# EAGLE board vuMeter (EAGLE 9.1.3)
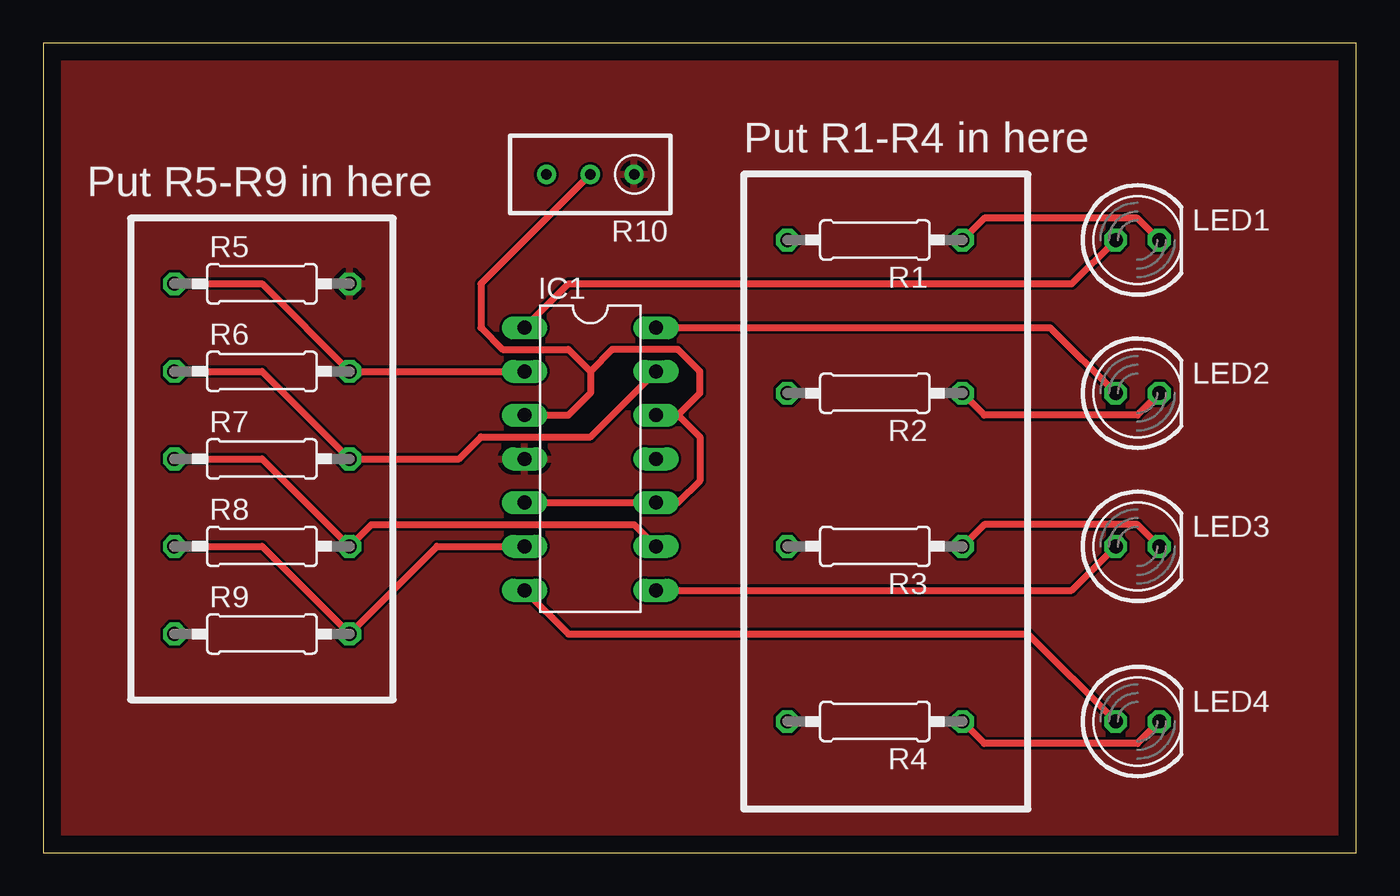
[diagram p0: board, top side]
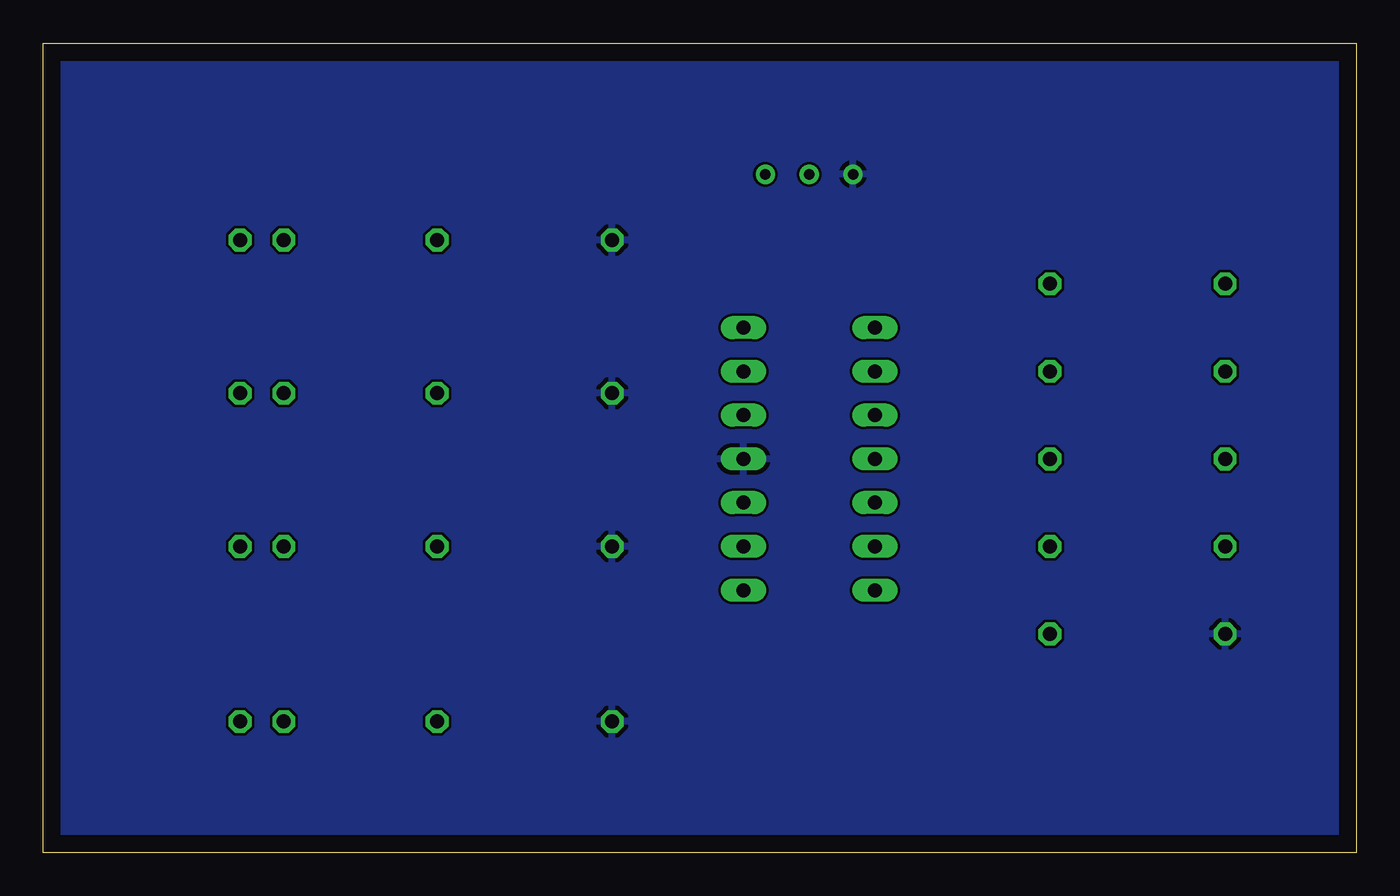
[diagram p1: board, bottom side, seen from below]

Size 76.2 x 46.99 mm. Coordinates in mm from the lower left corner, seen from the top.
Outline: 0,0 76.2,0 76.2,46.99 0,46.99 0,0
Copper layers (1*16): Top 0.035mm / dielectric 1.5mm / Bottom 0.035mm
Design rules "default": minimum track width 6mil, minimum drill 0.35mm, track to track 6mil, track to pad 6mil, pad to pad 6mil, via to via 6mil, smd to smd 6mil, copper to edge 40mil, drill to drill 6mil, minimum pad ring 10mil, minimum via ring 8mil, stop-mask expansion 4mil, vias tented up to drill 0mil, thermal gap 10mil

## Footprints (pad centres in the part's own frame; a part is rotated, then mirrored left to right if it is on the bottom)
DIL14 = drill 0.813 long: 1 -7.62,-3.81; 2 -5.08,-3.81; 3 -2.54,-3.81; 4 0,-3.81; 5 2.54,-3.81; 6 5.08,-3.81; 7 7.62,-3.81; 8 7.62,3.81; 9 5.08,3.81; 10 2.54,3.81; 11 0,3.81; 12 -2.54,3.81; 13 -5.08,3.81; 14 -7.62,3.81
LED5MM = drill 0.813 octagon: A -1.27,0; K 1.27,0
0207/10 = drill 0.813 octagon: 1 -5.08,0; 2 5.08,0
RTRIM3296W = drill 0.61: 1 0,-2.54; 2 0,0; 3 0,2.54

## Placement (x,y rotation side)
IC1  LM324N  [DIL14]  31.75,22.86 270 top
LED1  [LED5MM]  63.5,35.56 0 top
LED2  [LED5MM]  63.5,26.67 0 top
LED3  [LED5MM]  63.5,17.78 0 top
LED4  [LED5MM]  63.5,7.62 0 top
R1  2.2k  [0207/10]  48.26,35.56 180 top
R2  2.2k  [0207/10]  48.26,26.67 180 top
R3  2.2k  [0207/10]  48.26,17.78 180 top
R4  2.2k  [0207/10]  48.26,7.62 180 top
R5  10k  [0207/10]  12.7,33.02 0 top
R6  10k  [0207/10]  12.7,27.94 0 top
R7  10k  [0207/10]  12.7,22.86 0 top
R8  10k  [0207/10]  12.7,17.78 0 top
R9  10k  [0207/10]  12.7,12.7 0 top
R10  [RTRIM3296W]  31.75,39.37 90 top

## Library data of the parts
IC1 = linear
LED1-LED4 = led
R1-R9 = rcl; SPICEPREFIX: R
R10 = resistor

## Nets
GND: IC1.11 R1.2 R2.2 R3.2 R4.2 R9.1 R10.3
N$1: IC1.2 R5.1 R6.2
N$2: IC1.13 R6.1 R7.2
N$3: IC1.9 R7.1 R8.2
N$4: IC1.6 R8.1 R9.2
N$5: IC1.1 LED1.A
N$6: LED1.K R1.1
N$7: IC1.14 LED2.A
N$8: LED2.K R2.1
N$9: IC1.8 LED3.A
N$10: IC1.7 LED4.A
N$11: LED4.K R4.1
N$12: LED3.K R3.1
VCC: IC1.4 R5.2 R10.1
VIN: IC1.3 IC1.5 IC1.10 IC1.12 R10.2

## Tracks (layer width: path | path; a pad name or v marks a point on that pad's centre or on a via)
GND
  pour Bottom: 0,0 76.2,0 76.2,46.99 0,46.99
N$1
  Top 0.406: R5.1 12.7,33.02 R6.2 IC1.2
N$2
  Top 0.406: R6.1 12.7,27.94 R7.2 24.13,22.86 25.4,24.13 31.75,24.13 IC1.13
N$3
  Top 0.406: R7.1 12.7,22.86 R8.2 19.05,19.05 34.29,19.05 IC1.9
N$4
  Top 0.406: R8.1 12.7,17.78 R9.2 22.86,17.78 IC1.6
N$5
  Top 0.406: IC1.1 30.48,33.02 59.69,33.02 LED1.A
N$6
  Top 0.406: LED1.K 63.5,36.83 54.61,36.83 R1.1
N$7
  Top 0.406: IC1.14 58.42,30.48 LED2.A
N$8
  Top 0.406: LED2.K 63.5,25.4 54.61,25.4 R2.1
N$9
  Top 0.406: IC1.8 59.69,15.24 LED3.A
N$10
  Top 0.406: IC1.7 30.48,12.7 57.15,12.7 LED4.A
N$11
  Top 0.406: LED4.K 63.5,6.35 54.61,6.35 R4.1
N$12
  Top 0.406: LED3.K 63.5,19.05 54.61,19.05 R3.1
VCC
  pour Top: 0,0 76.2,0 76.2,46.99 0,46.99
VIN
  Top 0.406: IC1.5 IC1.10 36.83,20.32 38.1,21.59 38.1,24.13 36.83,25.4 | IC1.12 36.83,25.4 | 36.83,25.4 38.1,26.67 38.1,27.94 36.83,29.21 33.02,29.21 31.75,27.94 | IC1.3 30.48,25.4 31.75,26.67 31.75,27.94 | 31.75,27.94 30.48,29.21 26.67,29.21 25.4,30.48 25.4,33.02 R10.2

## Text on the board
tPlace: Put R1-R4 in here | Put R5-R9 in here